# Altium PCB PCB.PcbDoc
Units mm, origin at the board's own origin, x right, y up, seen from the top; angles counter-clockwise.
Board outline 75 x 100 mm, 2 copper layers (Top Layer, Bottom Layer); 23 components, 22 nets, 73 pads, 9 vias.
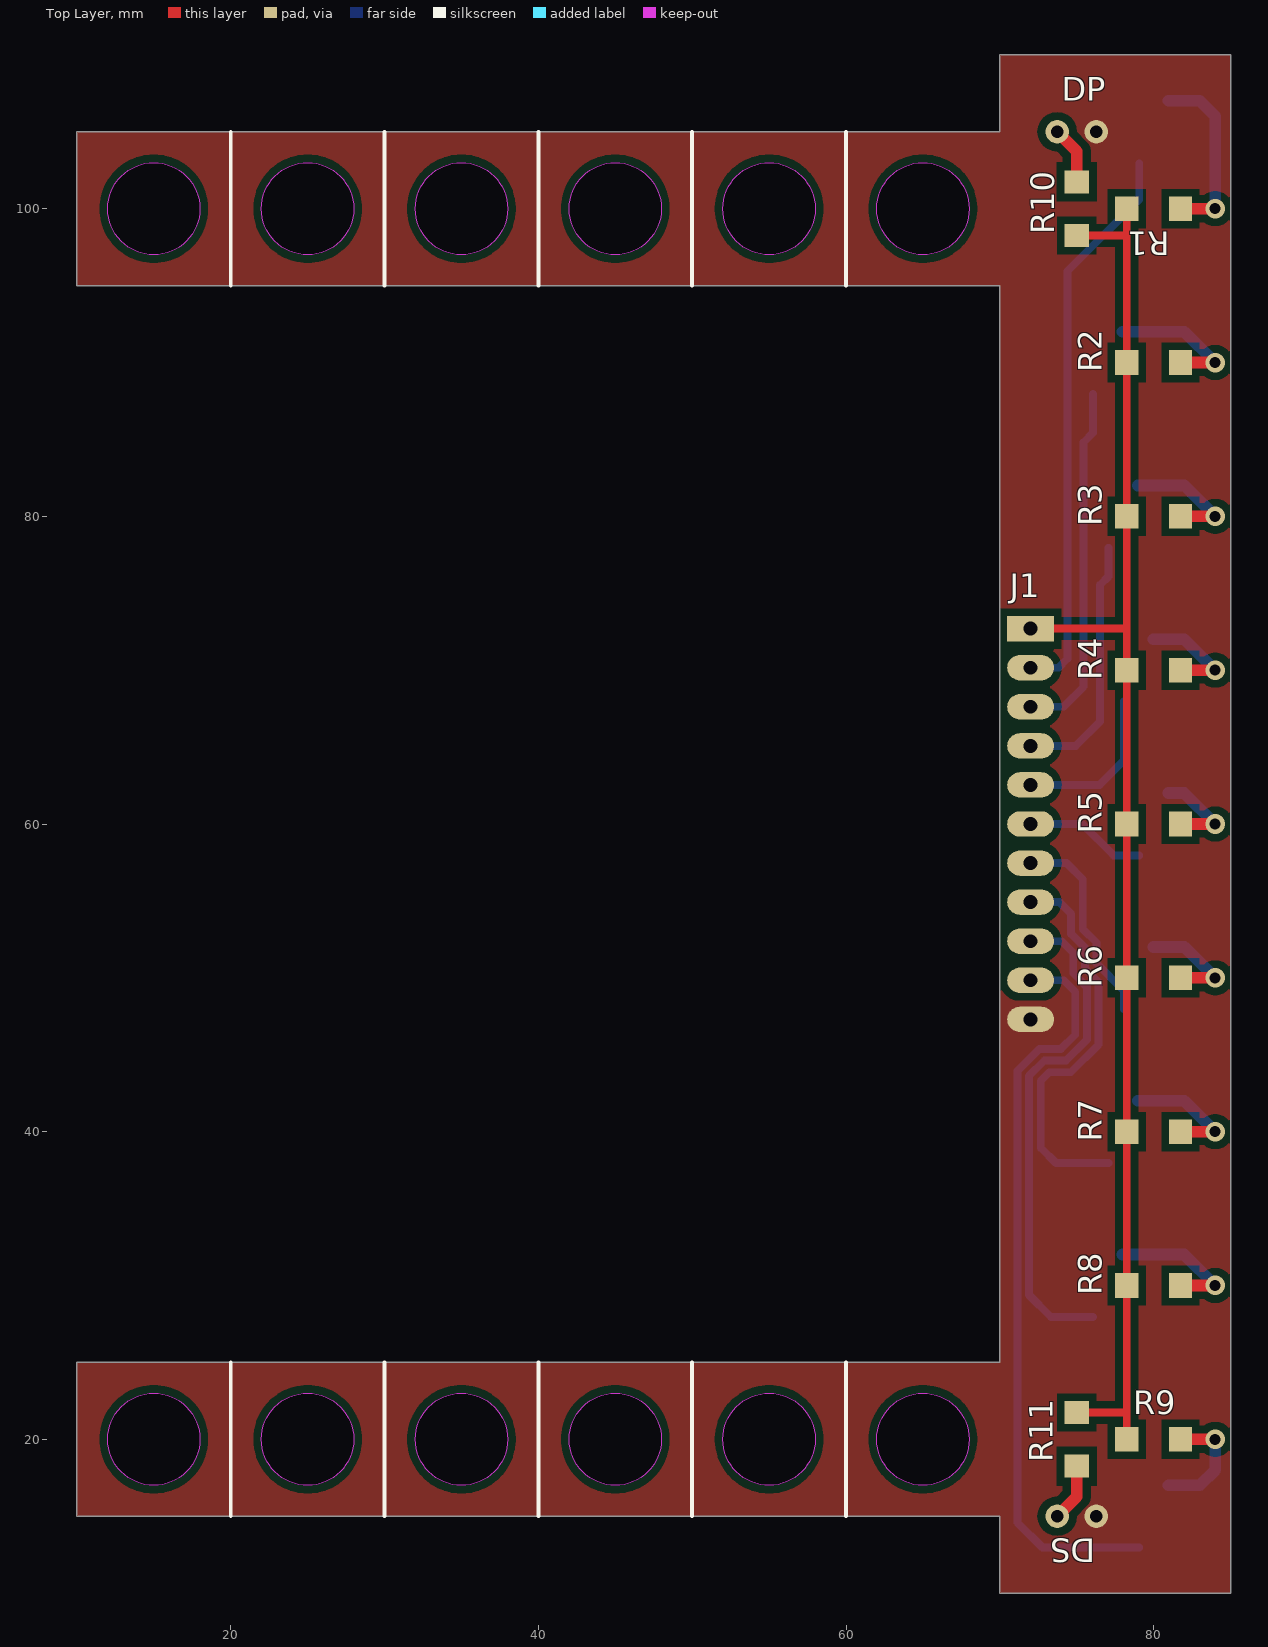
[diagram p0: Top Layer view]
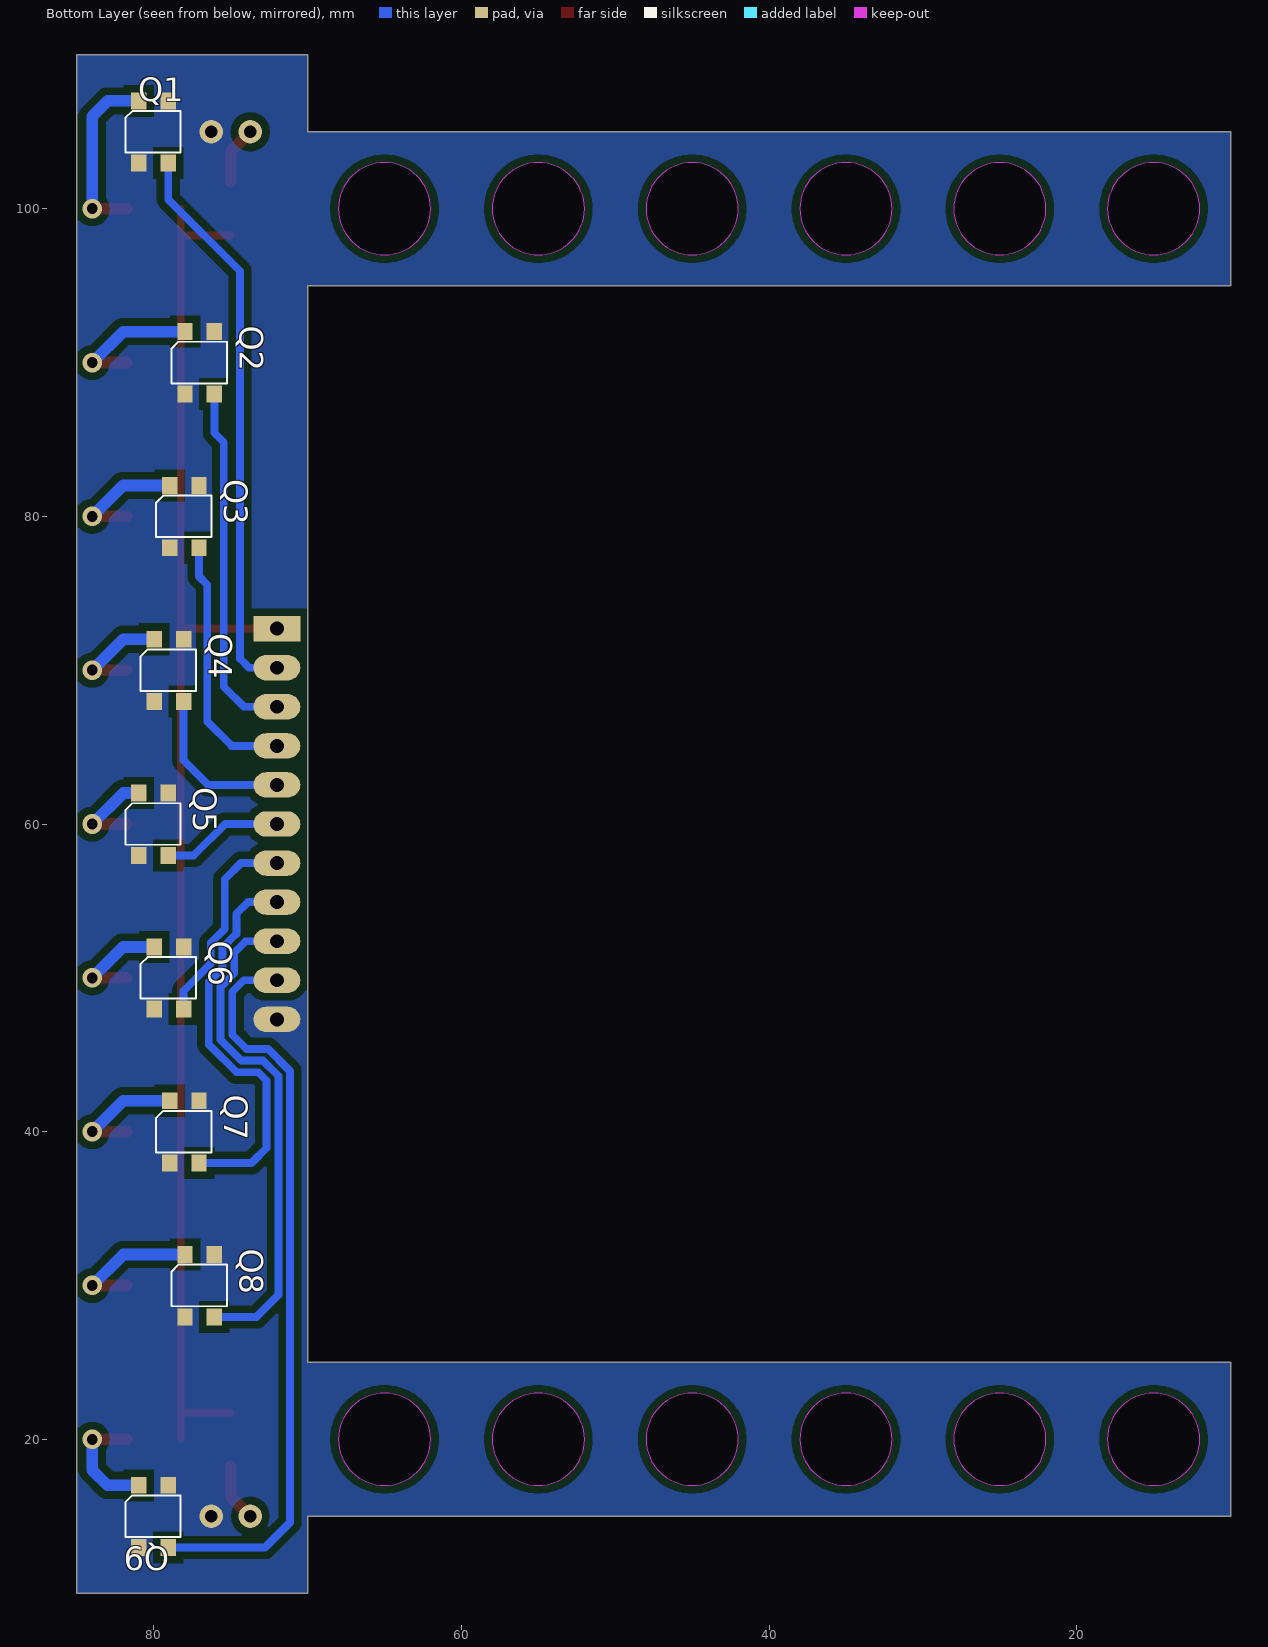
[diagram p1: Bottom Layer view, seen from below]
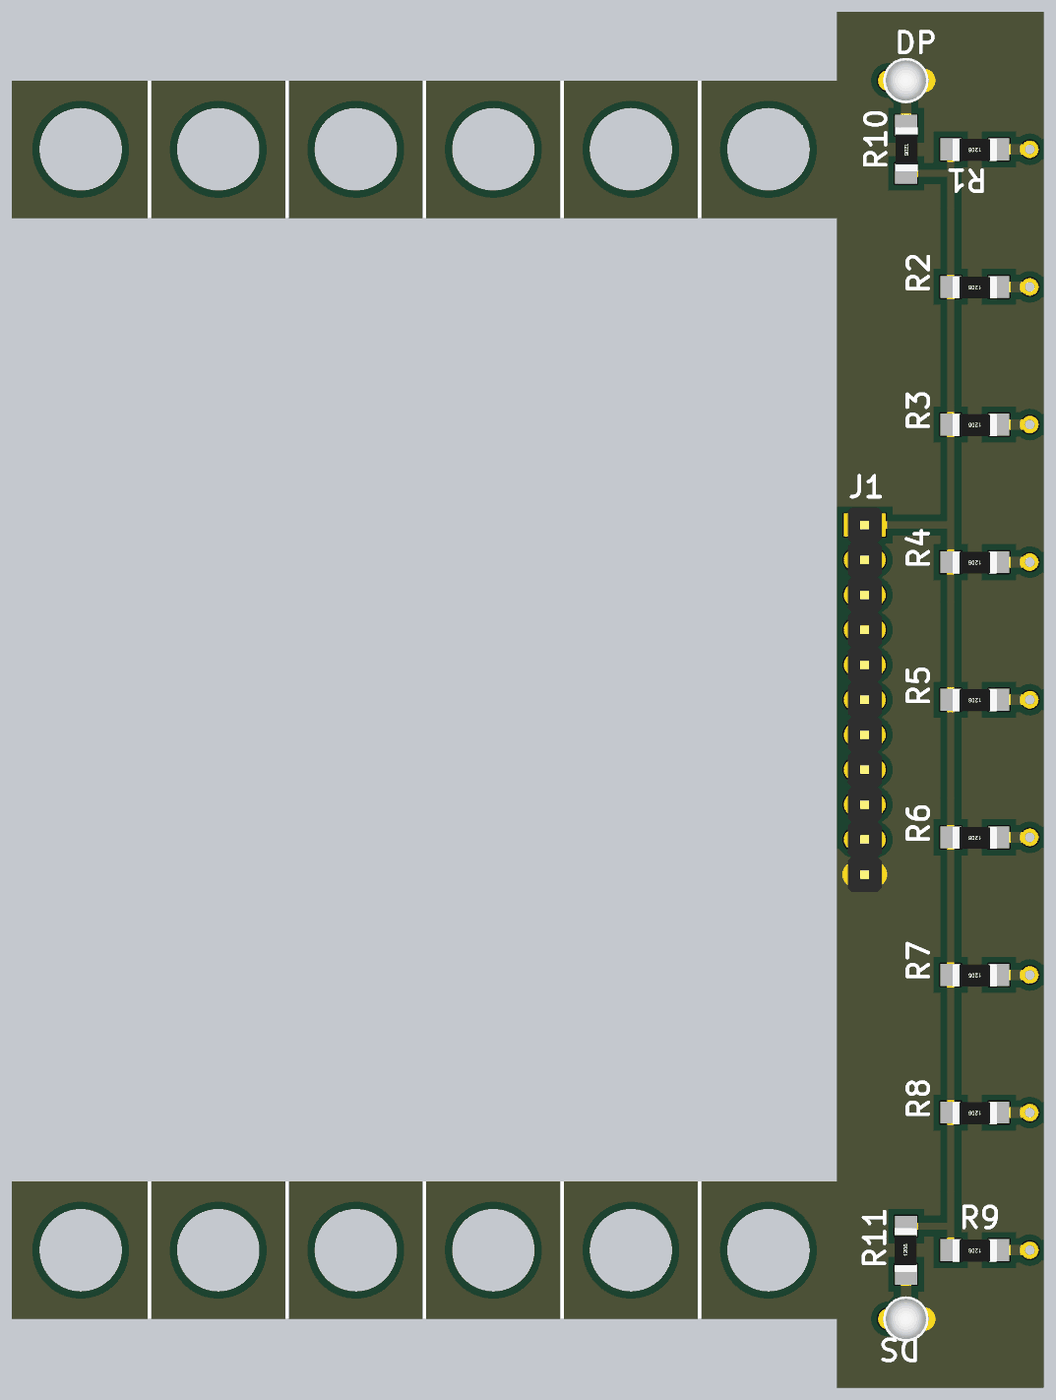
[diagram p2: 3D render of the assembled board from above, using the file's embedded part models]
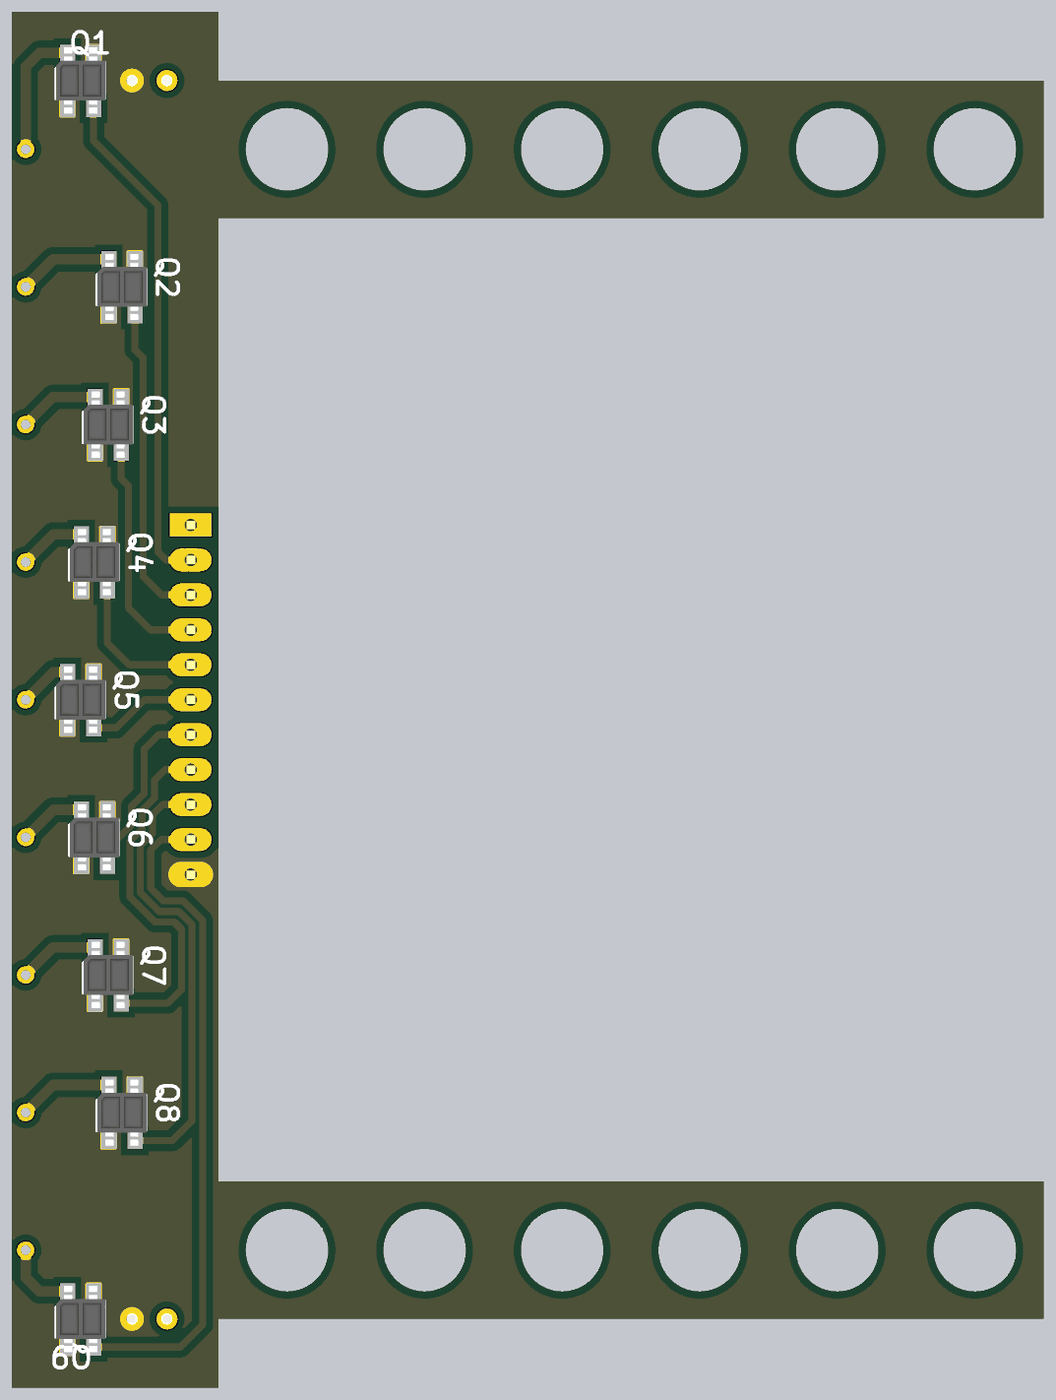
[diagram p3: 3D render of the assembled board from below, using the file's embedded part models]

## Layer stack, top to bottom
Top Solder: solder mask 0.0102, Solder Resist, Dk 3.5
Top Layer: signal copper 0.0356
Dielectric 1: dielectric 0.32, FR-4, Dk 4.8
Bottom Layer: signal copper 0.0356
Bottom Solder: solder mask 0.0102, Solder Resist, Dk 3.5

## Board outline
10,15 10,25 70,25 70,95 10,95 10,105 70,105 70,110 85,110 85,10 70,10 70,15
cut-out: 35,97 cw(c35,100) 32,100 cw(c35,100) 35,103 cw(c35,100) 38,100 cw(c35,100)
cut-out: 35,17 cw(c35,20) 32,20 cw(c35,20) 35,23 cw(c35,20) 38,20 cw(c35,20)
cut-out: 45,17 cw(c45,20) 42,20 cw(c45,20) 45,23 cw(c45,20) 48,20 cw(c45,20)
cut-out: 55,17 cw(c55,20) 52,20 cw(c55,20) 55,23 cw(c55,20) 58,20 cw(c55,20)
cut-out: 65,17 cw(c65,20) 62,20 cw(c65,20) 65,23 cw(c65,20) 68,20 cw(c65,20)
cut-out: 45,97 cw(c45,100) 42,100 cw(c45,100) 45,103 cw(c45,100) 48,100 cw(c45,100)
cut-out: 55,97 cw(c55,100) 52,100 cw(c55,100) 55,103 cw(c55,100) 58,100 cw(c55,100)
cut-out: 65,97 cw(c65,100) 62,100 cw(c65,100) 65,103 cw(c65,100) 68,100 cw(c65,100)
cut-out: 25,97 cw(c25,100) 22,100 cw(c25,100) 25,103 cw(c25,100) 28,100 cw(c25,100)
cut-out: 15,97 cw(c15,100) 12,100 cw(c15,100) 15,103 cw(c15,100) 18,100 cw(c15,100)
cut-out: 15,17 cw(c15,20) 12,20 cw(c15,20) 15,23 cw(c15,20) 18,20 cw(c15,20)
cut-out: 25,17 cw(c25,20) 22,20 cw(c25,20) 25,23 cw(c25,20) 28,20 cw(c25,20)

## Design rules (kind name [scope] priority, off if disabled: settings)
Clearance [All] p1: gap=0.254 except(0.508: Arc-Poly Track-Poly SMDPad-Poly THPad-Poly Via-Poly Fill-Poly Poly-Poly Poly-Region Poly-Text)
PlaneConnect [All] p1: planeconnectstyle=Direct reliefexpansion=0.508 reliefentries=4 reliefconductorwidth=0.762 reliefairgap=0.254
PolygonConnect [All] p1: connectstyle=Direct reliefconductorwidth=0.762 reliefentries=4 polygonreliefangle="90 Angle" airgapwidth=0.254
RoutingVias [All] p1: holewidth=0.711 width=1.27 viastyle="Through Hole" minholewidth=0.711 minwidth=1.27 maxholewidth=0.711 maxwidth=1.27
SolderMaskExpansion [All] p1: expansion=0.102
Width [All] p1: maxlimit=0.762 minlimit=0.254 preferedwidth=0.762
29 further rules are at their usual default settings.

## Components (designator, comment, footprint, x,y, rotation, side; value= is the part's Value field where it differs from the comment)
DP "LED" LED-3MM-RED 75,105 r0 top
DS "LED" LED-3MM-GREEN 75,15 r0 top
J1 "Header 1x11" "Header 1x11" 72,72.7 r0 top
Q1 "QRE1113GR" QRE1113GR 80,105 r270 bottom
Q2 "QRE1113GR" QRE1113GR 77,90 r270 bottom
Q3 "QRE1113GR" QRE1113GR 78,80 r270 bottom
Q4 "QRE1113GR" QRE1113GR 79,70 r270 bottom
Q5 "QRE1113GR" QRE1113GR 80,60 r270 bottom
Q6 "QRE1113GR" QRE1113GR 79,50 r270 bottom
Q7 "QRE1113GR" QRE1113GR 78,40 r270 bottom
Q8 "QRE1113GR" QRE1113GR 77,30 r270 bottom
Q9 "QRE1113GR" QRE1113GR 80,15 r270 bottom
R1 "RES" R1206 80,100 r180 top
R2 "RES" R1206 80,90 r180 top
R3 "RES" R1206 80,80 r180 top
R4 "RES" R1206 80,70 r180 top
R5 "RES" R1206 80,60 r180 top
R6 "RES" R1206 80,50 r180 top
R7 "RES" R1206 80,40 r180 top
R8 "RES" R1206 80,30 r180 top
R9 "RES" R1206 80,20 r180 top
R10 "RES" R1206 75,100 r270 top
R11 "RES" R1206 75,20 r90 top

## Footprints (in the part's own frame and the unit in brackets; to place one, negate y for a bottom-side part, rotate by r counter-clockwise, add the part's x,y. Pads: shape width x height; smd on the part's side, far side on the other; paste and mask are expansions set on the pad)
"Header 1x11" [mil]
  rect 120x65 hole 35.43: 1(0,0)
  oval 120x65 hole 35.43: 2(0,-100) 3(0,-200) 4(0,-300) 5(0,-400) 6(0,-500) 7(0,-600) 8(0,-700) 9(0,-800) 10(0,-900) 11(0,-1000)
  body extent -49,-1050 49,50, height 336
LED-3MM-GREEN [mil]
  round 60 hole 31.5: A(-50,0) K(50,0)
  body extent -66,-65 64,65, height 217
LED-3MM-RED [mil]
  round 60 hole 31.5: A(-50,0) K(50,0)
  body extent -66,-65 64,65, height 217
QRE1113GR [mm]
  rect 1.1x1 smd: A(-2.01,-0.97) C(2.04,0.94) E(-2.01,0.94) K(2.04,-0.97)
  silkscreen extent -1.35,-1.85 1.35,1.75, body extent -2.4,-1.8 2.4,1.8, height 1.83
R1206 [mm]
  rect 1.5x1.6 smd: 1(-1.75,0) 2(1.75,0)
  body extent -1.6,-0.76 1.6,0.84, height 0.68

## Via types
v1: diameter 1.27, hole 0.711, Top Layer to Bottom Layer, 9 vias

## Nets (pads, with @x,y where several pads share a name; then routed paths per layer and width w, separated by ;. In a path a pad name is that pad's centre, name@x,y a point inside that pad or via, vN(x,y) a via of type N, cw(c..) or ccw(c..) an arc to the next point about the centre after c; other vN are vias at no path point)
GND: DP.K DS.K J1.11 Q1.E Q1.K Q2.E Q2.K Q3.E Q3.K Q4.E Q4.K Q5.E Q5.K Q6.E Q6.K Q7.E Q7.K Q8.E Q8.K Q9.E Q9.K
IR1: J1.2 Q1.C | length 36.8
  Bottom Layer w0.508: J1.2 73.81,70.16 74.39,70.74 74.39,95.93 79.06,100.6 Q1.C
IR2: J1.3 Q2.C | length 23.3
  Bottom Layer w0.508: J1.3 74.14,67.62 75.45,68.93 75.45,84.82 76.06,85.43 Q2.C
IR3: J1.4 Q3.C | length 16.7
  Bottom Layer w0.508: J1.4 74.94,65.08 76.52,66.66 76.52,75.55 77.06,76.09 Q3.C
IR4: J1.5 Q4.C | length 10.5
  Bottom Layer w0.508: J1.5 76.47,62.54 78.06,64.13 Q4.C
IR5: J1.6 Q5.C | length 7.9
  Bottom Layer w0.508: J1.6 75.36,60 77.4,57.96 Q5.C
IR6: J1.7 Q6.C | length 13.4
  Bottom Layer w0.508: J1.7 74.33,57.46 75.392,56.398 75.392,53.173 76.294,52.271 76.294,50.929 78.06,49.163 Q6.C
IR7: J1.8 Q7.C | length 26.1
  Bottom Layer w0.508: J1.8 73.88,54.92 74.63,54.17 74.63,52.858 75.532,51.956 75.532,50.613 76.424,49.721 76.424,45.669 74.611,43.856 73.211,43.856 72.664,43.309 72.664,38.946 73.65,37.96 Q7.C
IR8: J1.9 Q8.C | length 32.8
  Bottom Layer w0.508: J1.9 74.03,52.38 74.77,51.64 74.77,50.298 75.662,49.406 75.662,45.984 74.296,44.618 72.896,44.618 71.902,43.624 71.902,29.378 73.32,27.96 Q8.C
IR9: J1.10 Q9.C | length 48.7
  Bottom Layer w0.508: J1.10 74.15,49.84 74.9,49.09 74.9,46.3 73.98,45.38 72.58,45.38 71.14,43.94 71.14,14.59 72.77,12.96 Q9.C
NetDP_A: DP.A R10.1 | length 3.8
  Top Layer w0.762: DP.A 75,103.73 R10.1
NetDS_A: DS.A R11.1 | length 3.8
  Top Layer w0.762: DS.A 75,16.27 R11.1
NetQ1_A: Q1.A R1.1 | length 11.7
  Top Layer w0.762: R1.1 v1(84,100)
  Bottom Layer w0.762: Q1.A 82.99,107.01 84,106 v1(84,100)
NetQ2_A: Q2.A R2.1 | length 9.1
  Top Layer w0.762: R2.1 v1(84,90)
  Bottom Layer w0.762: Q2.A 81.99,92.01 v1(84,90)
NetQ3_A: Q3.A R3.1 | length 8.1
  Top Layer w0.762: R3.1 v1(84,80)
  Bottom Layer w0.762: Q3.A 81.99,82.01 v1(84,80)
NetQ4_A: Q4.A R4.1 | length 7.1
  Top Layer w0.762: R4.1 v1(84,70)
  Bottom Layer w0.762: Q4.A 81.99,72.01 v1(84,70)
NetQ5_A: Q5.A R5.1 | length 6.1
  Top Layer w0.762: R5.1 v1(84,60)
  Bottom Layer w0.762: Q5.A 81.99,62.01 v1(84,60)
NetQ6_A: Q6.A R6.1 | length 7.1
  Top Layer w0.762: R6.1 v1(84,50)
  Bottom Layer w0.762: Q6.A 81.99,52.01 v1(84,50)
NetQ7_A: Q7.A R7.1 | length 8.1
  Top Layer w0.762: R7.1 v1(84,40)
  Bottom Layer w0.762: Q7.A 81.99,42.01 v1(84,40)
NetQ8_A: Q8.A R8.1 | length 9.1
  Top Layer w0.762: R8.1 v1(84,30)
  Bottom Layer w0.762: Q8.A 81.99,32.01 v1(84,30)
NetQ9_A: Q9.A R9.1 | length 7.7
  Top Layer w0.762: R9.1 v1(84,20)
  Bottom Layer w0.762: Q9.A 83.01,17.01 84,18 v1(84,20)
VCC: J1.1 R1.2 R2.2 R3.2 R4.2 R5.2 R6.2 R7.2 R8.2 R9.2 R10.2 R11.2 | length 92.7
  Top Layer w0.508: J1.1 78.25,72.7 ; R11.2 78.25,21.75 ; R10.2 78.25,98.25 ; R9.2 78.25,21.75 ; R1.2 78.25,98.25 ; 78.25,21.75 R8.2 R7.2 R6.2 R5.2 R4.2 78.25,72.7 ; 78.25,72.7 R3.2 R2.2 78.25,98.25

## Polygon pours and split planes (outlines as drawn)
GND on Bottom Layer "BOT-GND" (solid, remove dead copper, pour order 3): 10,15 10,25 70,25 70,95 10,95 10,105 70,105 70,110 85,110 85,10 70,10 70,15
GND on Top Layer "TOP-GND" (solid, remove dead copper, pour order 2): 10,15 10,25 70,25 70,95 10,95 10,105 70,105 70,110 85,110 85,10 70,10 70,15

## Silkscreen, mask and mechanical layers (free items; w line width, h text height)
Top Overlay:
  lines w0.254: 20,15 20,25 ; 20,95 20,105 ; 30,15 30,25 ; 30,95 30,105 ; 40,15 40,25 ; 40,95 40,105 ; 50,15 50,25 ; 50,95 50,105 ; 60,15 60,25 ; 60,95 60,105
Mechanical 1:
  circle w0.254: c35,100 r3
  circle w0.254: c35,20 r3
  circle w0.254: c45,20 r3
  circle w0.254: c55,20 r3
  circle w0.254: c65,20 r3
  circle w0.254: c45,100 r3
  circle w0.254: c55,100 r3
  circle w0.254: c65,100 r3
  circle w0.254: c25,100 r3
  circle w0.254: c15,100 r3
  circle w0.254: c15,20 r3
  circle w0.254: c25,20 r3
  lines w0.254: 10,15 10,25 70,25 70,95 10,95 10,105 70,105 70,110 85,110 85,10 70,10 70,15 10,15
Mechanical 2:
  lines w0.254: 70,25 85,25 ; 70,50 85,50 ; 70,60 85,60 ; 70,70 85,70 ; 70,95 85,95 ; 74.889,21.177 ccw(c-70,60) 74.889,98.823 ; 80,25 80,95